# Altium PCB PCB.PcbDoc
Units mm, origin at the board's own origin, x right, y up, seen from the top; angles counter-clockwise.
Board outline 84.71 x 95 mm, 2 copper layers (Top Layer, Bottom Layer); 25 components, 23 nets, 128 pads, 0 vias.
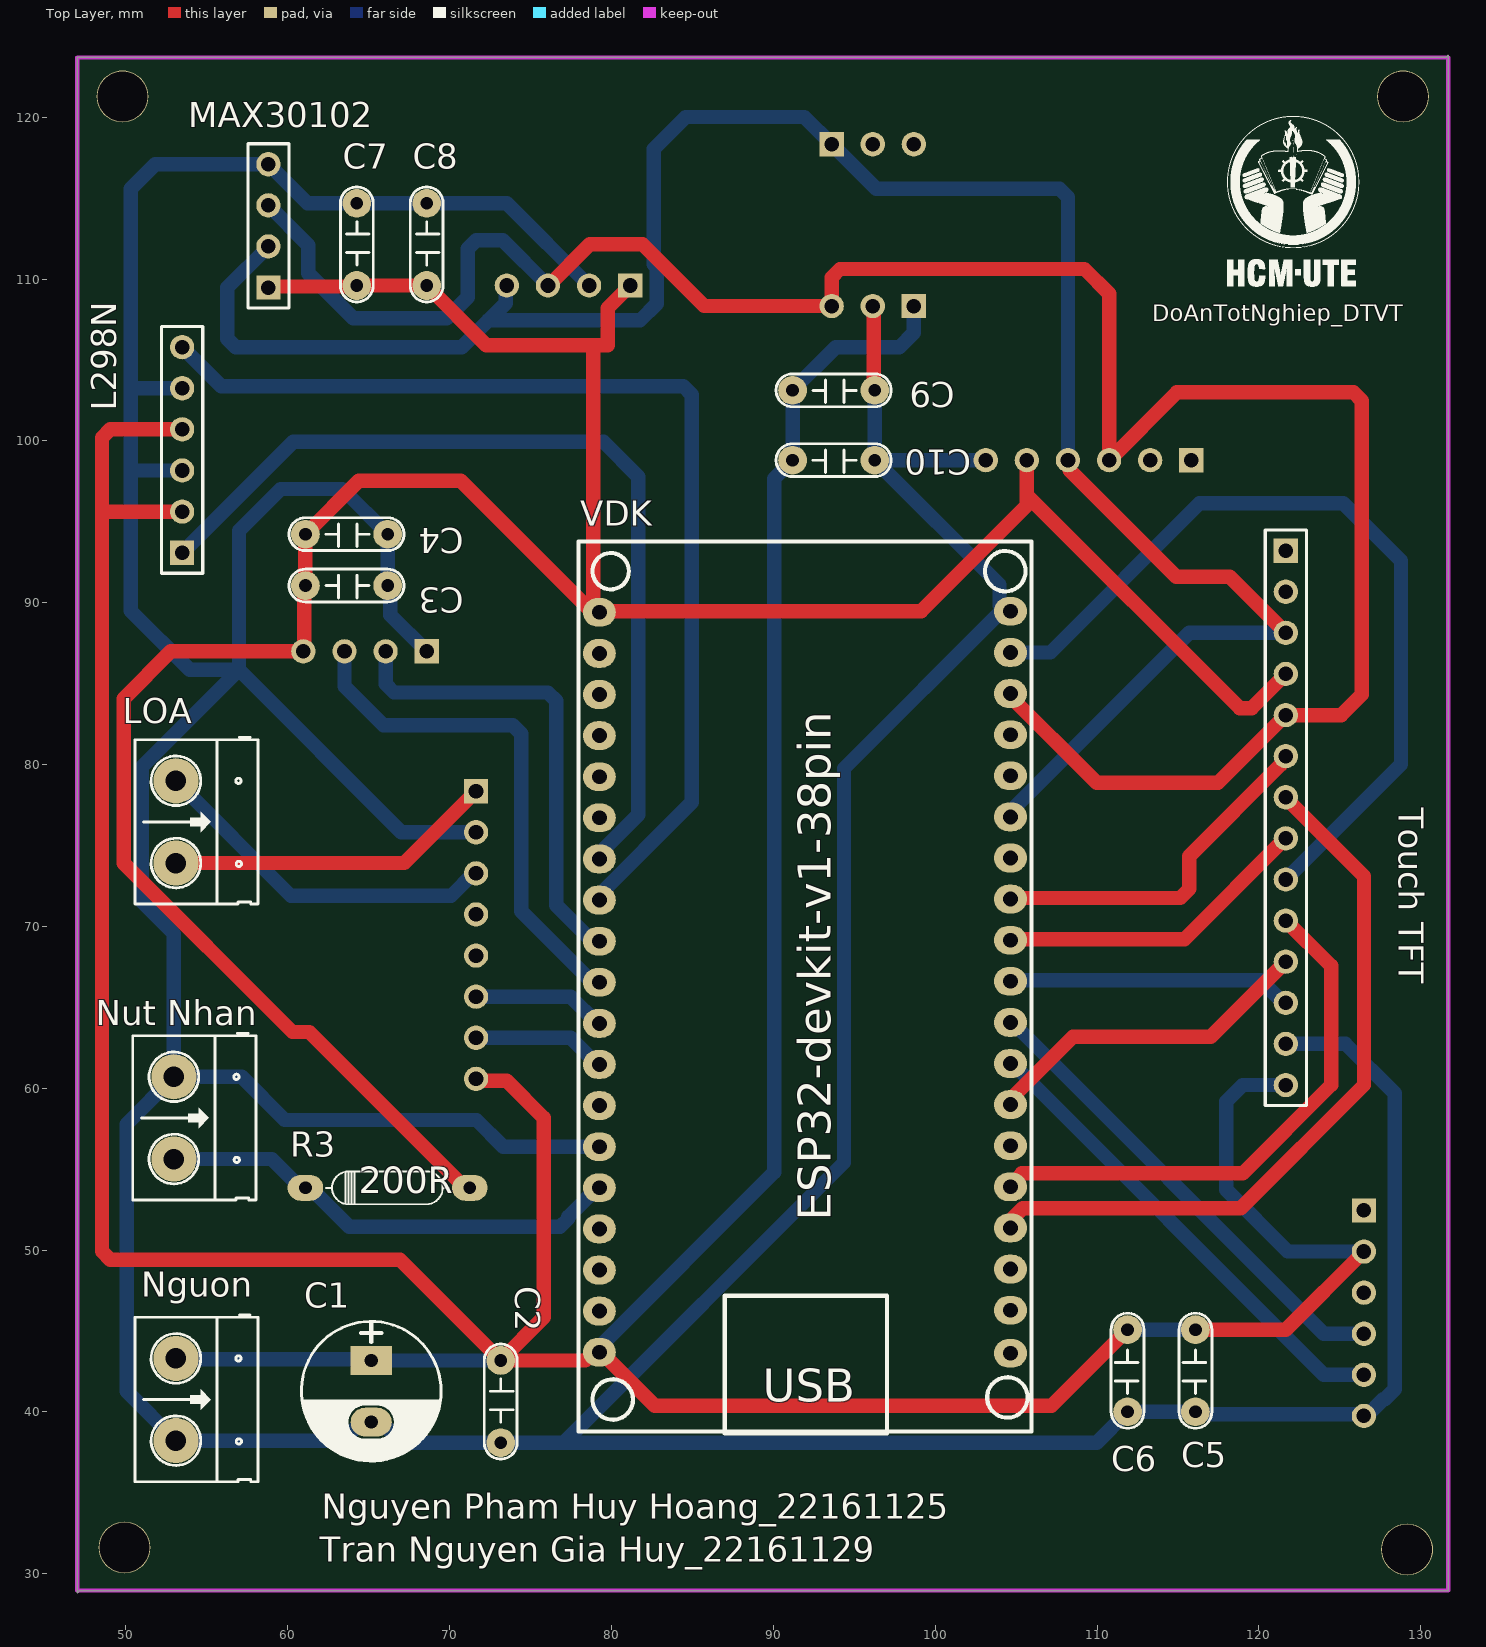
[diagram p0: Top Layer view]
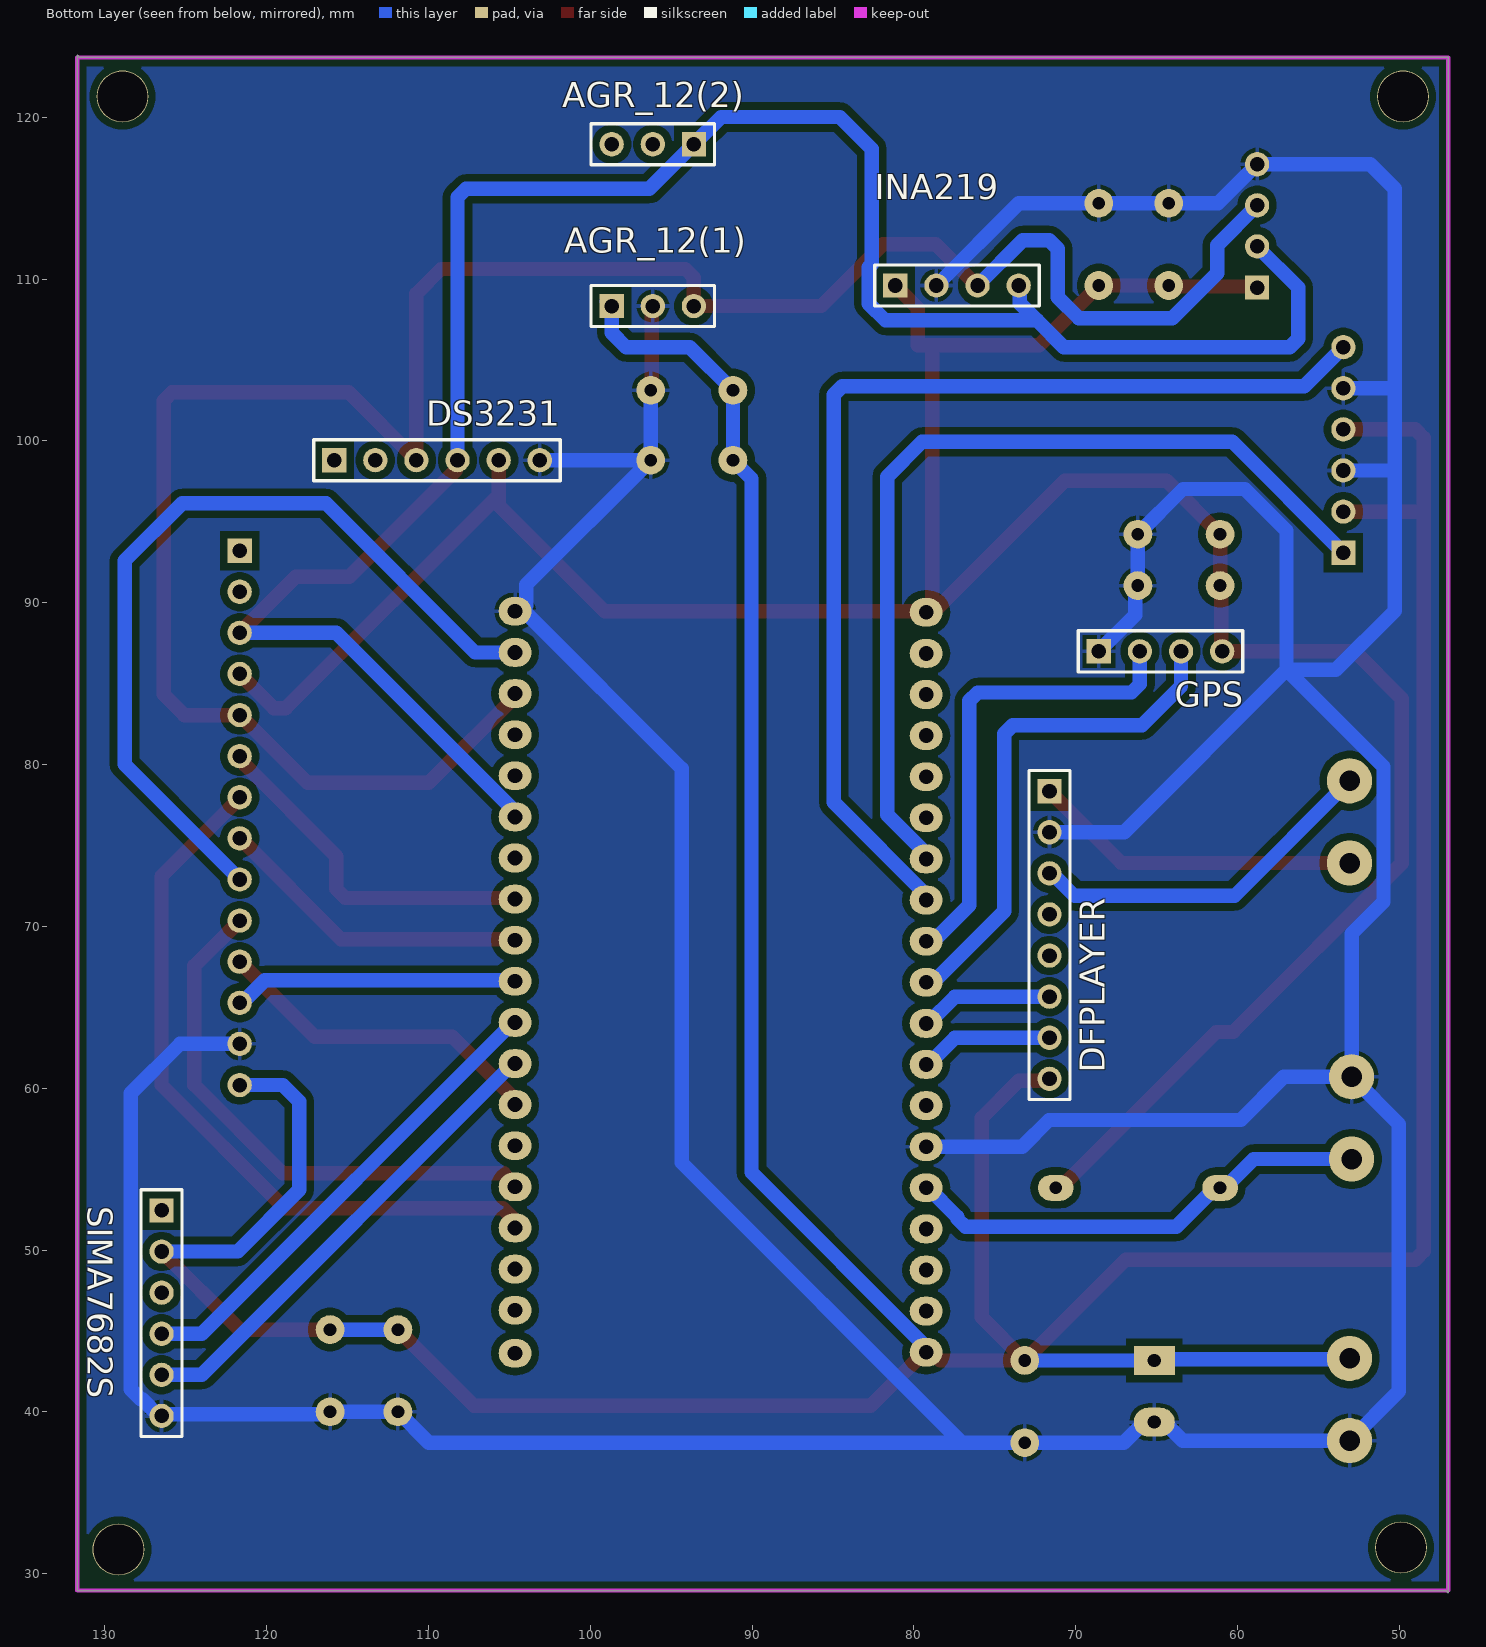
[diagram p1: Bottom Layer view, seen from below]
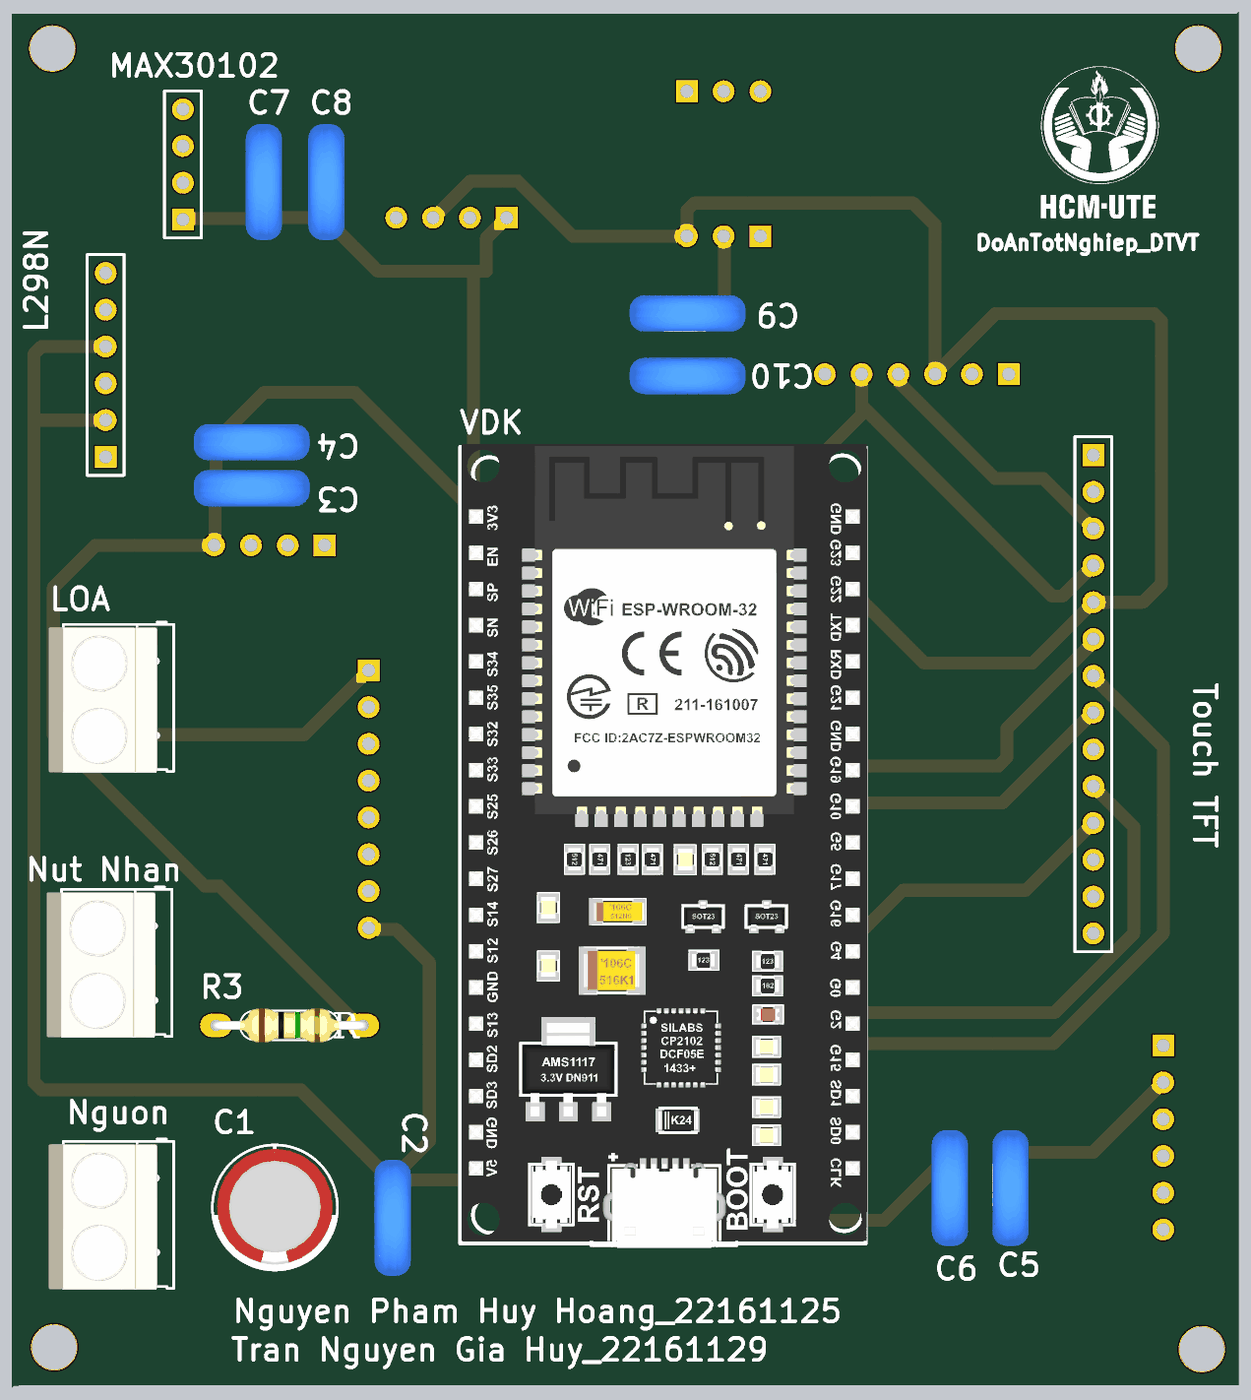
[diagram p2: 3D render of the assembled board from above, using the file's embedded part models]

## Layer stack, top to bottom
Top Solder: solder mask 0.0102, Solder Resist, Dk 3.5
Top Layer: signal copper 0.0356
Dielectric 1: dielectric 0.32, FR-4, Dk 4.8
Bottom Layer: signal copper 0.0356
Bottom Solder: solder mask 0.0102, Solder Resist, Dk 3.5

## Board outline
46.99,28.829 47.117,28.956 131.699,28.956 131.699,123.825 131.572,123.698 46.99,123.698

## Design rules (kind name [scope] priority, off if disabled: settings)
Clearance [All] p1: gap=0.45 ignorepadtopadclearanceinfootprint=FALSE
PolygonConnect [All] p1: connectstyle=Relief reliefconductorwidth=0.254 reliefentries=4 polygonreliefangle="90 Angle" airgapwidth=0.254
RoutingVias [All] p1: holewidth=0.711 width=1.27 viastyle="Through Hole" minholewidth=0.711 minwidth=1.27 maxholewidth=0.711 maxwidth=1.27
SolderMaskExpansion [All] p1: expansion=0.102 istentingtop=FALSE
Width [All] p1: maxlimit=0.889 minlimit=0.254 preferedwidth=0.889
30 further rules are at their usual default settings.

## Components (designator, comment, footprint, x,y, rotation, side; value= is the part's Value field where it differs from the comment)
AGR_12(1) "" HDR1X3 98.679,108.331 r180 bottom
AGR_12(2) "" HDR1X3 93.599,118.33 r0 bottom
C1 "220uF/16V" CP1.5/3.4 65.151,43.18 r270 top value=1000uF/16V
C2 "100nF" CN2 73.152,43.18 r270 top value=0.1uF
C3 "100nF" CN2 66.167,91.059 r180 top value=0.1uF
C4 "10uF" CN2 66.167,94.234 r180 top value=0.1uF
C5 "100nF" CN2 116.078,40.005 r90 top value=0.1uF
C6 "10uF" CN2 111.887,40.005 r90 top value=0.1uF
C7 "100nF" CN2 64.262,114.681 r270 top value=0.1uF
C8 "10uF" CN2 68.58,114.681 r270 top value=0.1uF
C9 "100nF" CN2 96.266,103.124 r180 top value=0.1uF
C10 "1uF" CN2 96.266,98.806 r180 top value=0.1uF
DFPLAYER "Header 8" HDR1X8 71.628,78.359 r270 bottom
DS3231 "Header 6" HDR1X6 115.824,98.806 r180 bottom
GPS "Header 4" HDR1X4 68.58,86.995 r180 bottom
INA219 "Header 4" HDR1X4 81.153,109.601 r180 bottom
L298N "Header 6" HDR1X6 53.467,93.091 r90 top
LOA "Header 2" HED2 53.086,78.994 r270 top (schematic designator Loa)
MAX30102 "Header 4" HDR1X4 58.801,109.474 r90 top
Nguon "Header 2" HED2 53.086,43.307 r270 top
"Nut Nhan" "Header 2" HED2 52.959,60.706 r270 top
R3 "R0.4W" "DIEN TRO 1/4 W" 61.087,53.848 r0 top value=10K
SIMA7682S "Header 6" HDR1X6 126.492,52.451 r270 bottom
"Touch TFT" "Header 14" HDR1X14 121.666,93.218 r270 top
VDK "ESP32-DEVKI-V1.0-PIN38" ESP32-DEVKIT-V1.0-38PIN 91.948,66.228 r0 top

## Footprints (in the part's own frame and the unit in brackets; to place one, negate y for a bottom-side part, rotate by r counter-clockwise, add the part's x,y. Pads: shape width x height; smd on the part's side, far side on the other; paste and mask are expansions set on the pad)
CN2 [mil]
  round 70 hole 31: 1(0,0) 2(200,0)
  silkscreen extent -40,-40 240,40, body extent -54,-44 260,55, height 407
CP1.5/3.4 [mil] "Tu hoa 220->470uF,16V, 470uF/16V,25V"
  rect 70x100 hole 32: 1(0,0)
  oval 70x100 hole 32: 2(150,0)
  silkscreen extent -95,-170 245,170, body extent -85,-157 230,157, height 446
"DIEN TRO 1/4 W" [mm]
  oval 2.2x1.6 hole 0.787: 1(0,0) 2(10.16,0)
  silkscreen extent 1.26,-1.02 8.88,1.02, body extent -0.3,-1.16 10.46,1.16, height 2.93
ESP32-DEVKIT-V1.0-38PIN [mil] "DEVKIT 38 PIN"
  oval 80x70 hole 36: 1(-500,912.59) 2(-500,812.59) 3(-500,712.59) 4(-500,612.59) 5(-500,512.59) 6(-500,412.59) 7(-500,312.59) 8(-500,212.59) 9(-500,112.59) 10(-500,12.59) 11(-500,-87.41) 12(-500,-187.41) 13(-500,-287.41) 14(-500,-387.41) 15(-500,-487.41) 16(-500,-587.41) 17(-500,-687.41) 18(-500,-787.41) 19(-500,-887.41) 20(500,-890.08) 21(500,-785.08) 22(500,-685.08) 23(500,-585.08) 24(500,-485.09) 25(500,-385.09) 26(500,-285.09) 27(500,-185.09) 28(500,-85.09) 29(500,14.91) 30(500,114.91) 31(500,214.91) 32(500,314.91) 33(500,414.91) 34(500,514.91) 35(500,614.91) 36(500,714.91) 37(500,814.91) 38(500,914.91)
  silkscreen extent -551,-1085 551,1085, body extent -547,-1092 555,1092, height 269
HDR1X3 [mm] "Connector; Header; 3 Position"
  rect 1.5x1.5 hole 0.9: 1(0,0)
  round 1.5 hole 0.9: 2(2.54,0) 3(5.08,0)
  silkscreen extent -1.27,-1.27 6.35,1.27, body extent -1.27,-1.27 6.35,1.27, height 7
HDR1X4 [mm] "Connector; Header; 4 Position"
  rect 1.5x1.5 hole 0.9: 1(0,0)
  round 1.5 hole 0.9: 2(2.54,0) 3(5.08,0) 4(7.62,0)
  silkscreen extent -1.27,-1.27 8.89,1.27, body extent -1.27,-1.27 8.89,1.27, height 7
HDR1X6 [mm] "Connector; Header; 6 Position"
  rect 1.5x1.5 hole 0.9: 1(0,0)
  round 1.5 hole 0.9: 2(2.54,0) 3(5.08,0) 4(7.62,0) 5(10.16,0) 6(12.7,0)
  silkscreen extent -1.27,-1.27 13.97,1.27, body extent -1.27,-1.27 13.97,1.27, height 7
HDR1X8 [mm] "Connector; Header; 8 Position"
  rect 1.5x1.5 hole 0.9: 1(0,0)
  round 1.5 hole 0.9: 2(2.54,0) 3(5.08,0) 4(7.62,0) 5(10.16,0) 6(12.7,0) 7(15.24,0) 8(17.78,0)
  silkscreen extent -1.27,-1.27 19.05,1.27, body extent -1.27,-1.27 19.05,1.27, height 7
HDR1X14 [mm] "Connector; Header; 14 Position"
  rect 1.5x1.5 hole 0.9: 1(0,0)
  round 1.5 hole 0.9: 2(2.54,0) 3(5.08,0) 4(7.62,0) 5(10.16,0) 6(12.7,0) 7(15.24,0) 8(17.78,0) 9(20.32,0) 10(22.86,0) 11(25.4,0) 12(27.94,0) 13(30.48,0) 14(33.02,0)
  silkscreen extent -1.27,-1.27 34.29,1.27, body extent -1.27,-1.27 34.29,1.27, height 7
HED2 [mil] "Header 2, 2 pin, hight 300mil, Pin to Pin 200, Colour Green"
  round 110 hole 50: 1(0,0) 2(200,0)
  silkscreen extent -106,-100 300,200, body extent -92,-140 302,155, height 394

## Part data
AGR_12(1) AGR_12(2): library part "Header 3", "Header, 3-Pin", LatestRevisionDate=17-Jul-2002, LatestRevisionNote="Re-released for DXP Platform.", Publisher="Altium Limited"
C1: library part CP4, "Cap 1000uF/16V - 220uF/50V", Description 1="2200uF-3300uF/6,3V - 1000uF-2200uF/10V", Description 2="1000uF/16V - 470uF => 1000uF/25V - 100uF/100V", Description 3=330uF>470uF/35V_220uF>470uF/50V_10uF>22uF/250V, Description 4="220uF => 330uF/63V - 10uF =>33uF/160 - 200V", Description 5="4,7uF>10uF/250V_3,3uF>10uF/400V - 2,2uF>4,7uF/450V"
C2 C3 C4 C5 C6 C7 C8 C9 C10: library part CN2, "Cap np 104 => 105pF"
DFPLAYER: "Header, 8-Pin", LatestRevisionDate=17-Jul-2002, LatestRevisionNote="Re-released for DXP Platform.", Publisher="Altium Limited"
DS3231 L298N SIMA7682S: "Header, 6-Pin", LatestRevisionDate=17-Jul-2002, LatestRevisionNote="Re-released for DXP Platform.", Publisher="Altium Limited"
GPS INA219 MAX30102: "Header, 4-Pin", LatestRevisionDate=17-Jul-2002, LatestRevisionNote="Re-released for DXP Platform.", Publisher="Altium Limited"
LOA Nguon "Nut Nhan": library part Hed2, "Header 2 (Green)"
R3: library part "Res 1/4 W", "Resistor", LatestRevisionDate=17-Jul-2002, LatestRevisionNote="Re-released for DXP Platform.", PackageReference=AXIAL-0.4, Published=8-Jun-2000, Publisher="Altium Limited"
"Touch TFT": "Header, 14-Pin", LatestRevisionDate=17-Jul-2002, LatestRevisionNote="Re-released for DXP Platform.", Publisher="Altium Limited"

## Free pads (board coordinates)
  round 3.2 hole 3.1: 4(49.911,31.623) 5(49.784,121.285) 6(128.905,121.285) 7(129.159,31.496)

## Nets (pads, with @x,y where several pads share a name; then routed paths per layer and width w, separated by ;. In a path a pad name is that pad's centre, name@x,y a point inside that pad or via, vN(x,y) a via of type N, cw(c..) or ccw(c..) an arc to the next point about the centre after c; other vN are vias at no path point)
3.3V: "Touch TFT.4" C3.2 C4.2 C7.2 C8.2 DS3231.5 GPS.4 INA219.1 MAX30102.1 R3.2 VDK.1 | length 179.8
  Top Layer w0.889: MAX30102.1 58.864,109.537 64.198,109.537 C7.2 C8.2 72.263,105.918 78.867,105.918 ; R3.2 70.947,53.848 61.321,63.474 60.285,63.474 49.853,73.906 49.853,84.074 52.774,86.995 GPS.4 61.023,87.058 61.023,90.995 C3.2 C4.2 64.389,97.536 70.678,97.536 78.74,89.474 VDK.1@78.867,89.474 ; INA219.1 79.756,108.204 79.756,105.918 78.867,105.918 ; DS3231.5 105.664,96.647 ; 121.666,85.598 119.558,83.49 118.821,83.49 105.664,96.647 ; VDK.1@78.867,89.474 78.867,105.918 ; VDK.1@78.867,89.474 99.126,89.474 105.664,96.012 105.664,96.647
5V: "Touch TFT.14" AGR_12(1).1 C1.1 C2.1 C5.2 C6.2 C9.2 C10.2 DFPLAYER.8 L298N.2 L298N.4 Nguon.1 SIMA7682S.2 VDK.19 | length 283.4
  Top Layer w0.889: L298N.2 48.514,95.631 ; L298N.4 49.035,100.711 48.514,100.19 48.514,95.631 ; DFPLAYER.8 71.745,60.462 73.523,60.462 75.819,58.166 75.819,45.847 C2.1 ; C6.2 107.188,40.386 82.677,40.386 79.375,43.688 VDK.19 78.88,43.688 78.372,43.18 C2.1 ; C5.2@116.248,45.255 C5.2 121.666,45.085 SIMA7682S.2 ; 48.514,95.631 48.514,49.924 49.035,49.403 66.929,49.403 C2.1
  Bottom Layer w0.889: Nguon.1 53.149,43.243 65.087,43.243 C1.1 C2.1 ; VDK.19@78.994,43.754 90.043,54.803 90.043,97.663 C10.2 C9.2 93.853,105.791 97.79,105.791 98.679,106.68 98.679,108.331 98.985,108.637 ; C6.2 C5.2 ; 121.666,60.198 118.999,60.198 117.983,59.182 117.983,53.721 121.793,49.911 SIMA7682S.2
BL: "Touch TFT.7" VDK.23 | length 45.6
  Top Layer w0.889: VDK.23@104.267,51.433 105.412,52.578 118.872,52.578 126.492,60.198 126.492,73.102 121.666,77.928 121.666,77.978
CS: "Touch TFT.12" VDK.29 | length 18
  Bottom Layer w0.889: VDK.29@104.267,66.673 120.114,66.673 121.509,65.278 121.666,65.278
ENA: L298N.1 VDK.7 | length 56.7
  Bottom Layer w0.889: L298N.1 60.325,99.949 79.502,99.949 81.661,97.79 81.661,76.901 78.994,74.234 VDK.7@78.867,74.234
ENB: L298N.6 VDK.8 | length 66.5
  Bottom Layer w0.889: L298N.6 55.88,103.378 84.442,103.378 84.963,102.857 84.963,77.663 78.994,71.694 VDK.8@78.867,71.694
GND: "Nut Nhan.1" "Touch TFT.13" AGR_12(1).2 C1.2 C2.2 C3.1 C4.1 C5.1 C6.1 C7.1 C8.1 C9.1 C10.1 DFPLAYER.2 DS3231.6 GPS.1 INA219.2 L298N.3 L298N.5 MAX30102.4 Nguon.2 SIMA7682S.6 VDK.14 VDK.38 | length 397.2
  Top Layer w0.889: 96.139,108.331 96.203,108.267 96.203,103.188 C9.1
  Bottom Layer w0.889: 50.294,94.49 50.292,94.488 ; 50.294,99.57 50.292,99.568 ; L298N.3 50.419,98.171 50.292,98.044 ; L298N.5 50.419,103.251 50.292,103.124 ; GPS.1 66.337,89.238 66.337,90.889 C3.1 C4.1 63.373,97.028 59.563,97.028 56.981,94.446 56.981,85.852 ; DFPLAYER.2 67.014,75.819 56.981,85.852 ; INA219.2 73.533,114.681 C8.1 C7.1 61.214,114.681 MAX30102.4 51.816,117.094 50.292,115.57 50.292,103.124 ; VDK.14 73.308,56.388 71.657,58.039 59.817,58.039 57.15,60.706 52.959,60.706 ; C9.1 C10.1 ; DS3231.6 C10.1 ; VDK.38@104.14,89.533 94.361,79.754 94.361,55.413 77.048,38.1 ; VDK.38@104.267,89.533 103.97,89.83 103.97,91.102 C10.1 ; C5.1@116.046,39.656 C5.1@116.11,39.592 ; 121.666,62.738 125.349,62.738 128.397,59.69 128.397,41.402 127.768,40.773 127.68,40.773 126.657,39.751 SIMA7682S.6 126.375,39.868 116.215,39.868 C5.1 C6.1 109.982,38.1 77.048,38.1 ; 50.292,94.488 50.292,98.044 ; 50.292,94.488 50.292,89.493 53.933,85.852 56.981,85.852 ; 50.292,98.044 50.292,99.568 ; 50.292,99.568 50.292,103.124 ; 52.959,60.706 50.038,57.785 50.038,41.275 Nguon.2 63.386,38.227 64.529,39.37 C1.2 65.773,39.37 67.043,38.1 C2.2 77.048,38.1 ; 52.959,60.706 52.959,69.557 50.99,71.526 50.99,79.862 56.981,85.852
MISO: "Touch TFT.6" VDK.31 | length 22.3
  Top Layer w0.889: VDK.31@104.267,71.753 115.134,71.753 115.697,72.316 115.697,74.335 121.36,79.998 121.36,80.047 121.666,80.353 121.666,80.518
MOSI: "Touch TFT.9" VDK.37 | length 52
  Bottom Layer w0.889: VDK.37 107.12,86.927 116.332,96.139 125.222,96.139 128.778,92.583 128.778,80.01 121.666,72.898
"NetNut Nhan_2": "Nut Nhan.2" R3.1 VDK.15 | length 29.2
  Bottom Layer w0.889: 53.023,55.689 52.959,55.626 59.009,55.626 60.787,53.848 R3.1 61.387,53.848 63.8,51.435 76.817,51.435 77.338,51.956 77.338,52.065 79.121,53.848 VDK.15
NetSIMA7682S_4: SIMA7682S.4 VDK.28 | length 29.8
  Bottom Layer w0.889: VDK.28 104.775,64.067 124.011,44.831 SIMA7682S.4
NetSIMA7682S_5: SIMA7682S.5 VDK.27 | length 29.9
  Bottom Layer w0.889: VDK.27@104.267,61.593 VDK.27@104.394,61.593 ; VDK.27 104.775,61.527 124.011,42.291 SIMA7682S.5
RS: "Touch TFT.10" VDK.24 | length 34.1
  Top Layer w0.889: VDK.24@104.267,53.973 104.595,53.973 105.359,54.737 118.999,54.737 124.46,60.198 124.46,67.564 121.666,70.358
RST: "Touch TFT.11" VDK.26 | length 21
  Top Layer w0.889: VDK.26@104.267,59.053 104.394,59.053 108.516,63.175 117.023,63.175 121.666,67.818
RX_DF: DFPLAYER.7 VDK.12 | length 8.4
  Bottom Layer w0.889: DFPLAYER.7 77.47,63.119 79.121,61.468 VDK.12 ; VDK.12@78.834,61.501 VDK.12@78.867,61.534
RX_GPS: GPS.3 VDK.10 | length 31.5
  Bottom Layer w0.889: GPS.3 63.5,84.836 65.913,82.423 73.901,82.423 74.422,81.902 74.422,70.932 78.74,66.614 VDK.10@78.867,66.614
SCK: "Touch TFT.8" VDK.30 | length 20
  Top Layer w0.889: VDK.30@104.267,69.213 115.406,69.213 121.631,75.438 121.666,75.438
SCL: "Touch TFT.5" AGR_12(1).3 DS3231.3 INA219.3 MAX30102.3 VDK.36 | length 138.9
  Top Layer w0.889: INA219.3 76.123,109.601 78.663,112.141 81.915,112.141 85.725,108.331 93.599,108.331 93.599,110.096 94.12,110.617 109.22,110.617 110.744,109.093 DS3231.3 114.935,102.997 125.844,102.997 126.365,102.476 126.365,84.328 125.095,83.058 121.666,83.058 117.475,78.867 109.98,78.867 104.394,84.453 VDK.36@104.267,84.453
  Bottom Layer w0.889: MAX30102.3@58.684,114.671 MAX30102.3 61.261,112.094 61.261,110.357 64.049,107.569 69.809,107.569 71.12,108.88 71.12,111.874 71.641,112.395 73.279,112.395 INA219.3
SDA: "Touch TFT.3" AGR_12(2).1 DS3231.4 INA219.4 MAX30102.2 VDK.33 | length 131.9
  Top Layer w0.889: DS3231.4 108.321,98.689 108.321,98.181 114.897,91.605 118.199,91.605 121.666,88.138
  Bottom Layer w0.889: MAX30102.2 56.261,109.474 56.261,106.312 56.782,105.791 70.739,105.791 72.39,107.442 ; INA219.4 73.457,109.525 73.457,108.509 72.39,107.442 ; VDK.33@104.267,76.833 104.394,76.833 115.699,88.138 121.666,88.138 ; DS3231.4 108.204,115.049 107.683,115.57 96.359,115.57 93.599,118.33 91.914,120.015 84.582,120.015 82.602,118.035 82.602,110.918 82.798,110.722 82.798,108.48 81.759,107.442 72.39,107.442
SPK1: DFPLAYER.3 LOA.1 | length 22.1
  Bottom Layer w0.889: LOA.1 60.198,71.882 70.078,71.882 71.475,73.279 DFPLAYER.3
SPK2: DFPLAYER.1 LOA.2 | length 20.4
  Top Layer w0.889: LOA.2 67.183,73.914 DFPLAYER.1
TX_DF: DFPLAYER.6 VDK.11 | length 8.4
  Bottom Layer w0.889: DFPLAYER.6 77.47,65.659 79.121,64.008 VDK.11 ; VDK.11@78.834,64.041 VDK.11@78.867,64.074
TX_GPS: GPS.2 VDK.9 | length 28.8
  Bottom Layer w0.889: GPS.2 66.04,84.976 66.561,84.455 76.06,84.455 76.581,83.934 76.581,71.313 78.74,69.154 VDK.9@78.867,69.154
pads on no net: "Touch TFT.1" "Touch TFT.2" AGR_12(2).2 AGR_12(2).3 DFPLAYER.4 DFPLAYER.5 DS3231.1 DS3231.2 SIMA7682S.1 SIMA7682S.3 VDK.2 VDK.3 VDK.4 VDK.5 VDK.6 VDK.13 VDK.16 VDK.17 VDK.18 VDK.20 VDK.21 VDK.22 VDK.25 VDK.32 VDK.34 VDK.35

## Polygon pours and split planes (outlines as drawn)
GND on Bottom Layer "GND_L02_P001" (solid, remove dead copper, pour order 1): 46.99,123.708 46.99,28.956 131.699,28.956 131.699,123.698

## Keep-outs
Keep-Out Layer:
  lines w0.254: 46.99,28.956 131.699,28.956 131.699,123.698 46.99,123.698 46.99,123.444 46.99,28.956

## Silkscreen, mask and mechanical layers (free items; w line width, h text height)
Top Overlay:
  drawing of 20 lines, arcs and shapes, not listed
  text "DoAnTotNghiep_DTVT" at 113.411,107.4 h1.02
  text "Nguyen Pham Huy Hoang_22161125" at 62.103,33.401 h1.52
  text "Tran Nguyen Gia Huy_22161129" at 61.976,30.734 h1.52

## Text inside footprints (layer, text, board x,y; h text height)
R3: Top Overlay "200R" at 64.389,52.959 h2.8
VDK: Top Overlay "USB" at 89.348,40.64 h2.03; Top Overlay "ESP32-devkit-v1-38pin" at 93.539,51.816 h2.03 r90